# Altium PCB ShuttleBoard.PcbDoc
Units mil, origin at the board's own origin, x right, y up, seen from the top; angles counter-clockwise.
Board outline 1675 x 2125 mil, 2 copper layers (Top Layer, Bottom Layer); 4 components, 14 nets, 60 pads, 4 vias.
Unrouted connection lines stored in the file: 4.
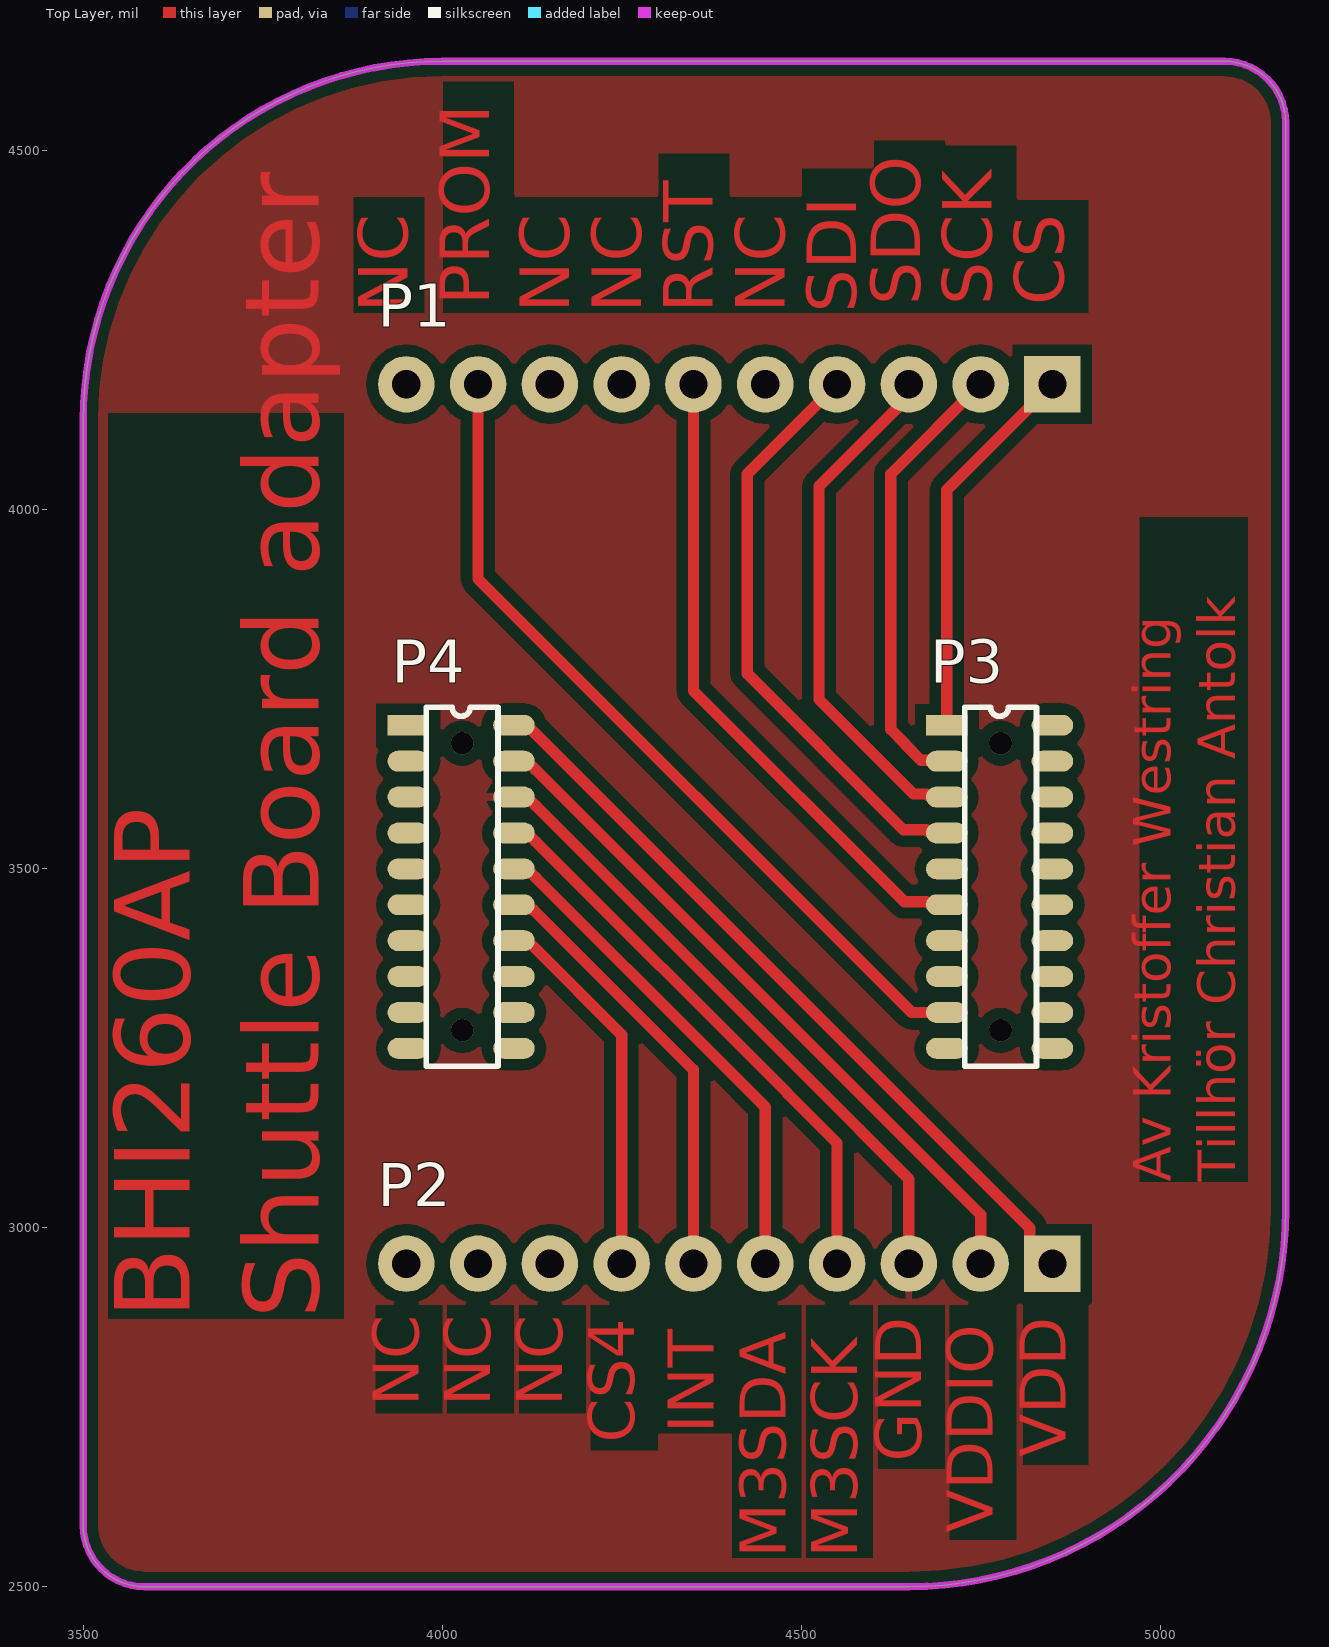
[diagram p0: Top Layer view]
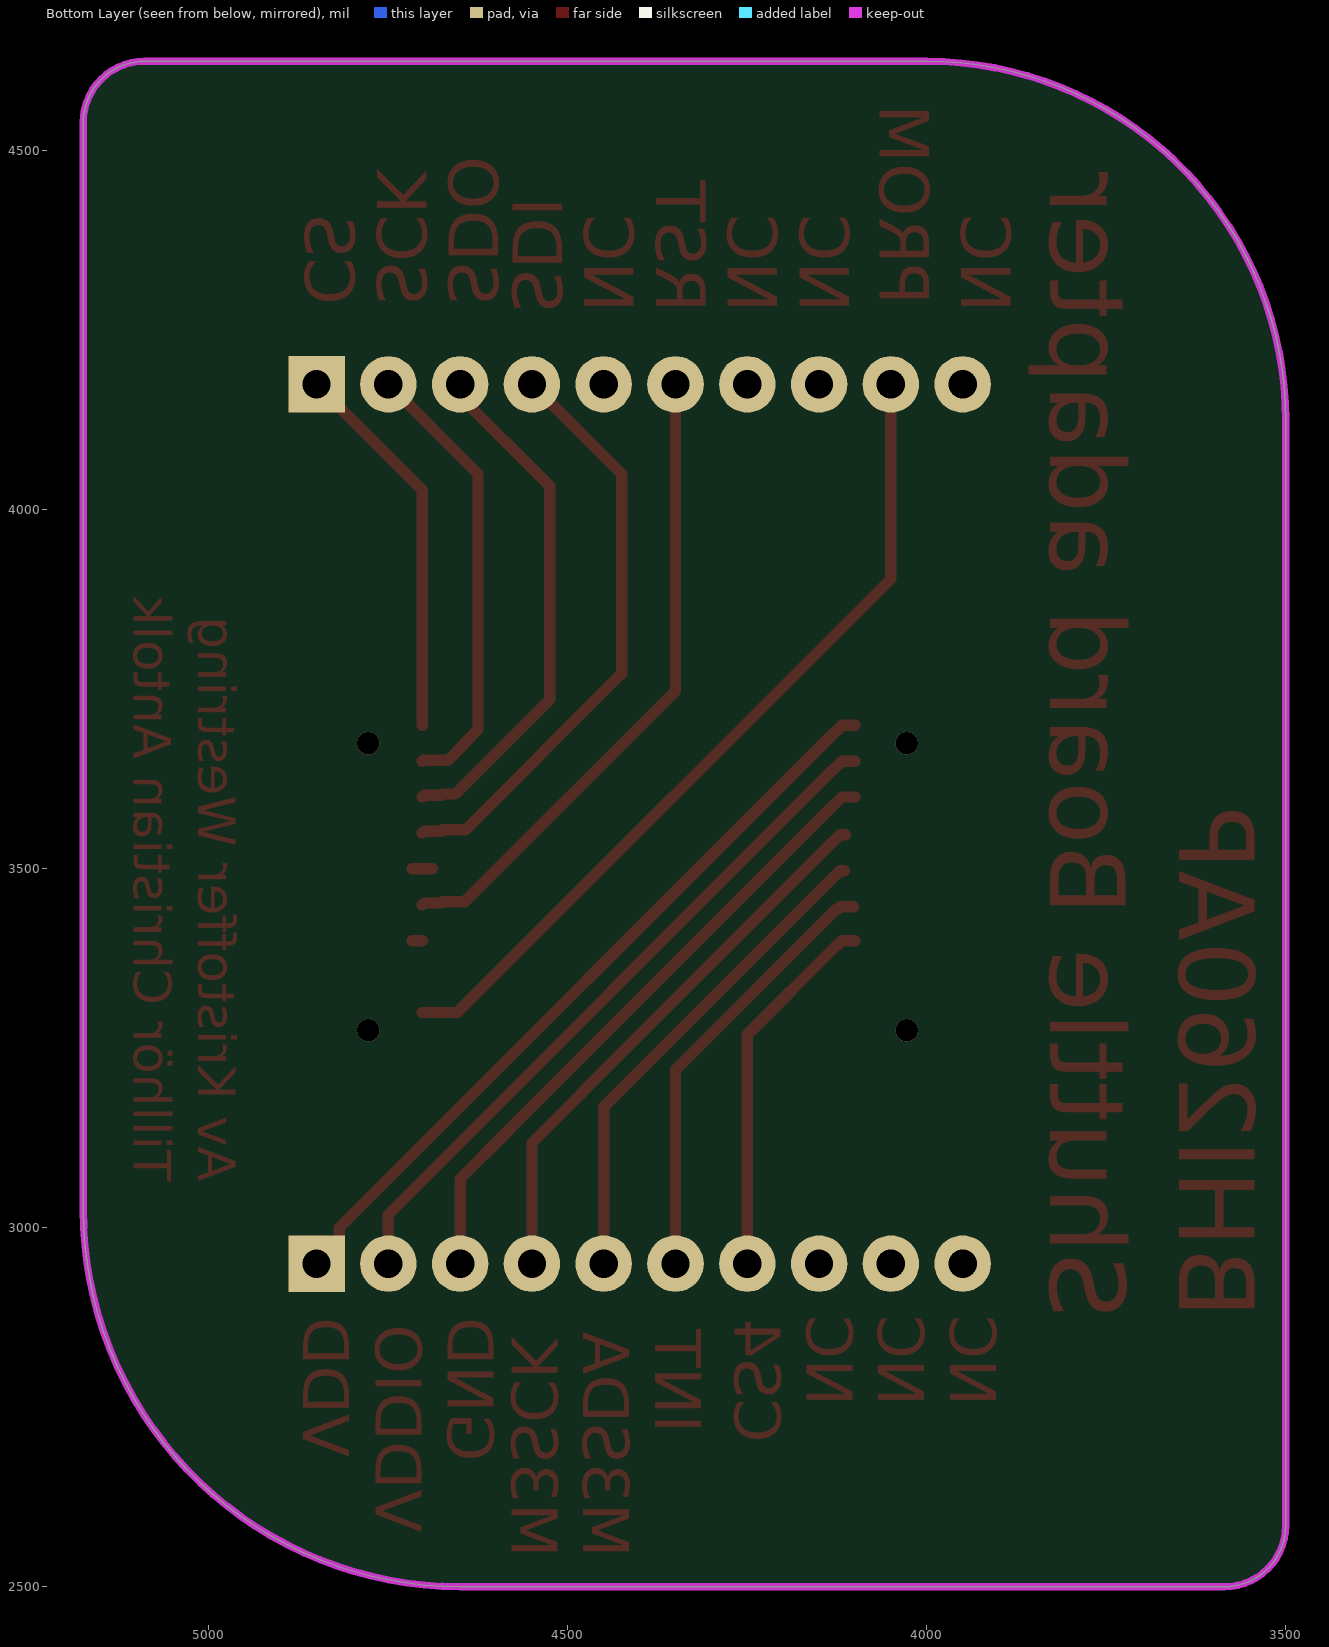
[diagram p1: Bottom Layer view, seen from below]

## Layer stack, top to bottom
Top Solder: solder mask 0.4, Solder Resist, Dk 3.5
Top Layer: signal copper 1.4
Dielectric 1: dielectric 12.6, FR-4, Dk 4.8
Bottom Layer: signal copper 1.4
Bottom Solder: solder mask 0.4, Solder Resist, Dk 3.5

## Board outline
3500,2585.36 3500,3850 3500,4125 cw(c4000,4125) 4000,4625 5089.64,4625 cw(c5089.64,4539.64) 5175,4539.64 5175,3025 cw(c4650,3025) 4650,2500 4300,2500 3585.36,2500 cw(c3585.36,2585.36)

## Design rules (kind name [scope] priority, off if disabled: settings)
Clearance [All] p1: gap=15.75 ignorepadtopadclearanceinfootprint=FALSE except(0: Arc-Text Track-Text SMDPad-Text THPad-Text Via-Text Fill-Text Poly-Text Region-Text Text-Text)
MinimumSolderMaskSliver [All] p1: minsoldermaskwidth=3.94
NetsToIgnore [InNet('NC')] p1:
PolygonConnect [All] p1: connectstyle=Relief reliefconductorwidth=10 reliefentries=4 polygonreliefangle="90 Angle" airgapwidth=10
RoutingVias [All] p1: holewidth=28 width=50 viastyle="Through Hole" minholewidth=28 minwidth=50 maxholewidth=28 maxwidth=50
SilkToSolderMaskClearance [IsPad] p1: minsilkscreentomaskgap=3.94 clearancetoexposedcopper=TRUE
SolderMaskExpansion [All] p1: expansion=4 istentingtop=FALSE
UnRoutedNet UnRoutedNet_1 [All] p1 off:
UnRoutedNet NC [InNet('NC')] p2 off:
Width [All] p1: maxlimit=39.37 minlimit=11.81 preferedwidth=15.75
27 further rules are at their usual default settings.

## Components (designator, comment, footprint, x,y, rotation, side; value= is the part's Value field where it differs from the comment)
P1 "1x10 Pin Header" 1x10HEADER 4850,4175 r270 top value="1x2 Pin Header"
P2 "1x10 Pin Header" 1x10HEADER 4850,2950 r270 top value="1x2 Pin Header"
P3 "2x10 Pin Header" SOP20 4702.76,3700 r0 top
P4 "2x10 Pin Header" SOP20 3952.76,3700 r0 top

## Footprints (in the part's own frame and the unit in brackets; to place one, negate y for a bottom-side part, rotate by r counter-clockwise, add the part's x,y. Pads: shape width x height; smd on the part's side, far side on the other; paste and mask are expansions set on the pad)
1x10HEADER [mm] "Pad Diameter 2 mm, Hole  1 mm, Pitch 2.54 mm"
  rect 2x2 hole 1: 1(0,0)
  round 2 hole 1: 2(0,-2.54) 3(0,-5.08) 4(0,-7.62) 5(0,-10.16) 6(0,-12.7) 7(0,-15.24) 8(0,-17.78) 9(0,-20.32) 10(0,-22.86)
  body extent -1.27,-24.13 1.27,1.27, height 5.94
SOP20 [mm]
  rect 1.47x0.74 smd: 1(0,0)
  oval 1.47x0.74 smd: 2(0,-1.27) 3(0,-2.54) 4(0,-3.81) 5(0,-5.08) 6(0,-6.35) 7(0,-7.62) 8(0,-8.89) 9(0,-10.16) 10(0,-11.43) 11(3.74,-11.43) 12(3.74,-10.16) 13(3.74,-8.89) 14(3.74,-7.62) 15(3.74,-6.35) 16(3.74,-5.08) 17(3.74,-3.81) 18(3.74,-2.54) 19(3.74,-1.27) 20(3.74,0)
  silkscreen extent 0.64,-12.06 3.17,0.64

## Part data
P1 P2: "2.54 mm, TH"
P3 P4: "1.27 mm"

## Via types
v1: diameter 31.5, hole 31.5, Top Layer to Bottom Layer, 4 vias

## Nets (pads, with @x,y where several pads share a name; then routed paths per layer and width w, separated by ;. In a path a pad name is that pad's centre, name@x,y a point inside that pad or via, vN(x,y) a via of type N, cw(c..) or ccw(c..) an arc to the next point about the centre after c; other vN are vias at no path point)
CS: P1.1 P3.1 | length 536
  Top Layer w15.75: P3.1 4702.76,4027.76 P1.1
CS4: P2.7 P4.14 | length 523.3
  Top Layer w15.75: P4.14 4117.99,3400 4124.69,3393.31 4125.69,3393.31 4250,3269 P2.7
GND: P2.3 P4.18 | length 888.6
  Top Layer w15.75: P4.18 4117.99,3600 4129.8,3588.19 4130.19,3588.19 4581.5,3136.88 4581.5,3136.5 4650,3068 P2.3
INT: P2.6 P4.15 | length 611.6
  Top Layer w15.75: P4.15@4102.56,3447.44 4120.55,3447.44 4124.69,3443.31 4126.69,3443.31 4350,3220 P2.6
M3_SCK: P2.4 P4.17 | length 782.5
  Top Layer w15.75: P4.17@4113.56,3547.44 4120.55,3547.44 4129.8,3538.19 4130.19,3538.19 4481.5,3186.88 4481.5,3186.5 4550,3118 P2.4
M3_SDA: P2.5 P4.16 | length 690.1
  Top Layer w15.75: P4.16@4114.56,3497.44 4120.55,3497.44 4129.8,3488.19 4130.19,3488.19 4381.5,3236.88 4450,3168.38 P2.5
NC: P1.5 P1.8 P3.5 P3.7 P3.8 | length 43.1
  Top Layer w15.75: P3.5@4688.39,3500 P3.5 P3.5@4717.13,3500 ; P3.7 P3.7@4717.13,3400
PROM_RW: P1.9 P3.9 | length 1173.9
  Top Layer w15.75: P1.9 4050,3904 4654,3300 P3.9
RESET: P1.6 P3.6 | length 903.2
  Top Layer w15.75: P1.6 4350,3748 4643.63,3454.37 4674.55,3454.37 4676.36,3452.56 4700.19,3452.56 P3.6
SCK: P1.2 P3.2 | length 629.2
  Top Layer w15.75: P3.2 4701.59,3651.17 4667.04,3651.17 4645,3673.21 4645,3674 4625,3694 4625,4050 P1.2
SDI: P1.4 P3.4 | length 824.5
  Top Layer w15.75: P1.4 4425,4050 4425,3772 4642.63,3554.37 4674.55,3554.37 4676.36,3552.56 4700.19,3552.56 P3.4
SDO: P1.3 P3.3 | length 724.9
  Top Layer w15.75: P1.3 4650,4157.95 4525,4032.95 4525,3736 4656.63,3604.37 4674.55,3604.37 4676.36,3602.56 4700.19,3602.56 P3.3
VDD: P2.1 P4.20 | length 1071.4
  Top Layer w15.75: P4.20 4117.99,3700 4129.8,3688.19 4130.19,3688.19 4818.5,2999.87 4818.5,2981.5 P2.1
VDDIO: P2.2 P4.19 | length 980
  Top Layer w15.75: P4.19 4117.99,3650 4129.8,3638.19 4130.19,3638.19 4750,3018.38 P2.2
pads on no net: P1.7 P1.10 P2.8 P2.9 P2.10 P3.10 P3.11 P3.12 P3.13 P3.14 P3.15 P3.16 P3.17 P3.18 P3.19 P3.20 P4.1 P4.2 P4.3 P4.4 P4.5 P4.6 P4.7 P4.8 P4.9 P4.10 P4.11 P4.12 P4.13
copper on no net:
  other v1: 4027.76,3275 4777.76,3275 4027.76,3675 4777.76,3675

## Polygon pours and split planes (outlines as drawn)
GND on Top Layer "GND_L01_P000" (solid, pour order 0): 3500,2585.36 3500,3850 3500,4125 cw(c4000,4125) 4000,4625 5089.64,4625 cw(c5089.64,4539.64) 5175,4539.64 5175,3025 cw(c4650,3025) 4650,2500 4300,2500 3585.36,2500 cw(c3585.36,2585.36)

## Keep-outs
Keep-Out Layer:
  lines w10: 3500,2585.36 ccw(c3585.36,2585.36) 3585.36,2500 4300,2500 4650,2500 ccw(c4650,3025) 5175,3025 5175,4050 5175,4539.64 ccw(c5089.64,4539.64) 5089.64,4625 4050,4625 4000,4625 ccw(c4000,4125) 3500,4125 3500,3850 3500,2585.36

## Other copper
Top Layer:
  text "PROM" at 4088.77,4285 h118.11 r90
  text "SDO" at 4688.77,4285 h118.11 r90
  text "SCK" at 4788.77,4285 h118.11 r90
  text "CS" at 4888.77,4285 h118.11 r90
  text "NC" at 3975,4275 h118.11 r90
  text "NC" at 4200,4275 h118.11 r90
  text "NC" at 4300,4275 h118.11 r90
  text "RST" at 4400,4275 h118.11 r90
  text "NC" at 4500,4275 h118.11 r90
  text "SDI" at 4600,4275 h118.11 r90
  text "Av Kristoffer Westring / Tillhör Christian Antolk" at 5122,3064.5 h90 r90
  text "BHI260AP / Shuttle Board adapter" at 3863,2873.38 h180 r90
  text "NC" at 3988.86,2751.43 h110 r90
  text "NC" at 4088.86,2751.43 h110 r90
  text "NC" at 4188.86,2751.43 h110 r90
  text "INT" at 4400,2713.96 h110 r90
  text "CS4" at 4288.86,2700.39 h110 r90
  text "VDD" at 4890,2680.17 h110 r90
  text "GND" at 4688.86,2674.07 h110 r90
  text "VDDIO" at 4788.86,2575.49 h110 r90
  text "M3SCK" at 4600,2540.69 h110 r90
  text "M3SDA" at 4500,2540.31 h110 r90